# Altium PCB CH32H417QEU6-R0.PcbDoc (part 1 of 2)
Units mil, origin at the board's own origin, x right, y up, seen from the top; angles counter-clockwise.
Board outline 3149.61 x 3818.9 mil, 4 copper layers (Top Layer, Layer 1, Layer 2, Bottom Layer), stack 23.756 mil thick; 96 components, 143 nets, 504 pads, 599 vias.
Unrouted connection lines stored in the file: 18.
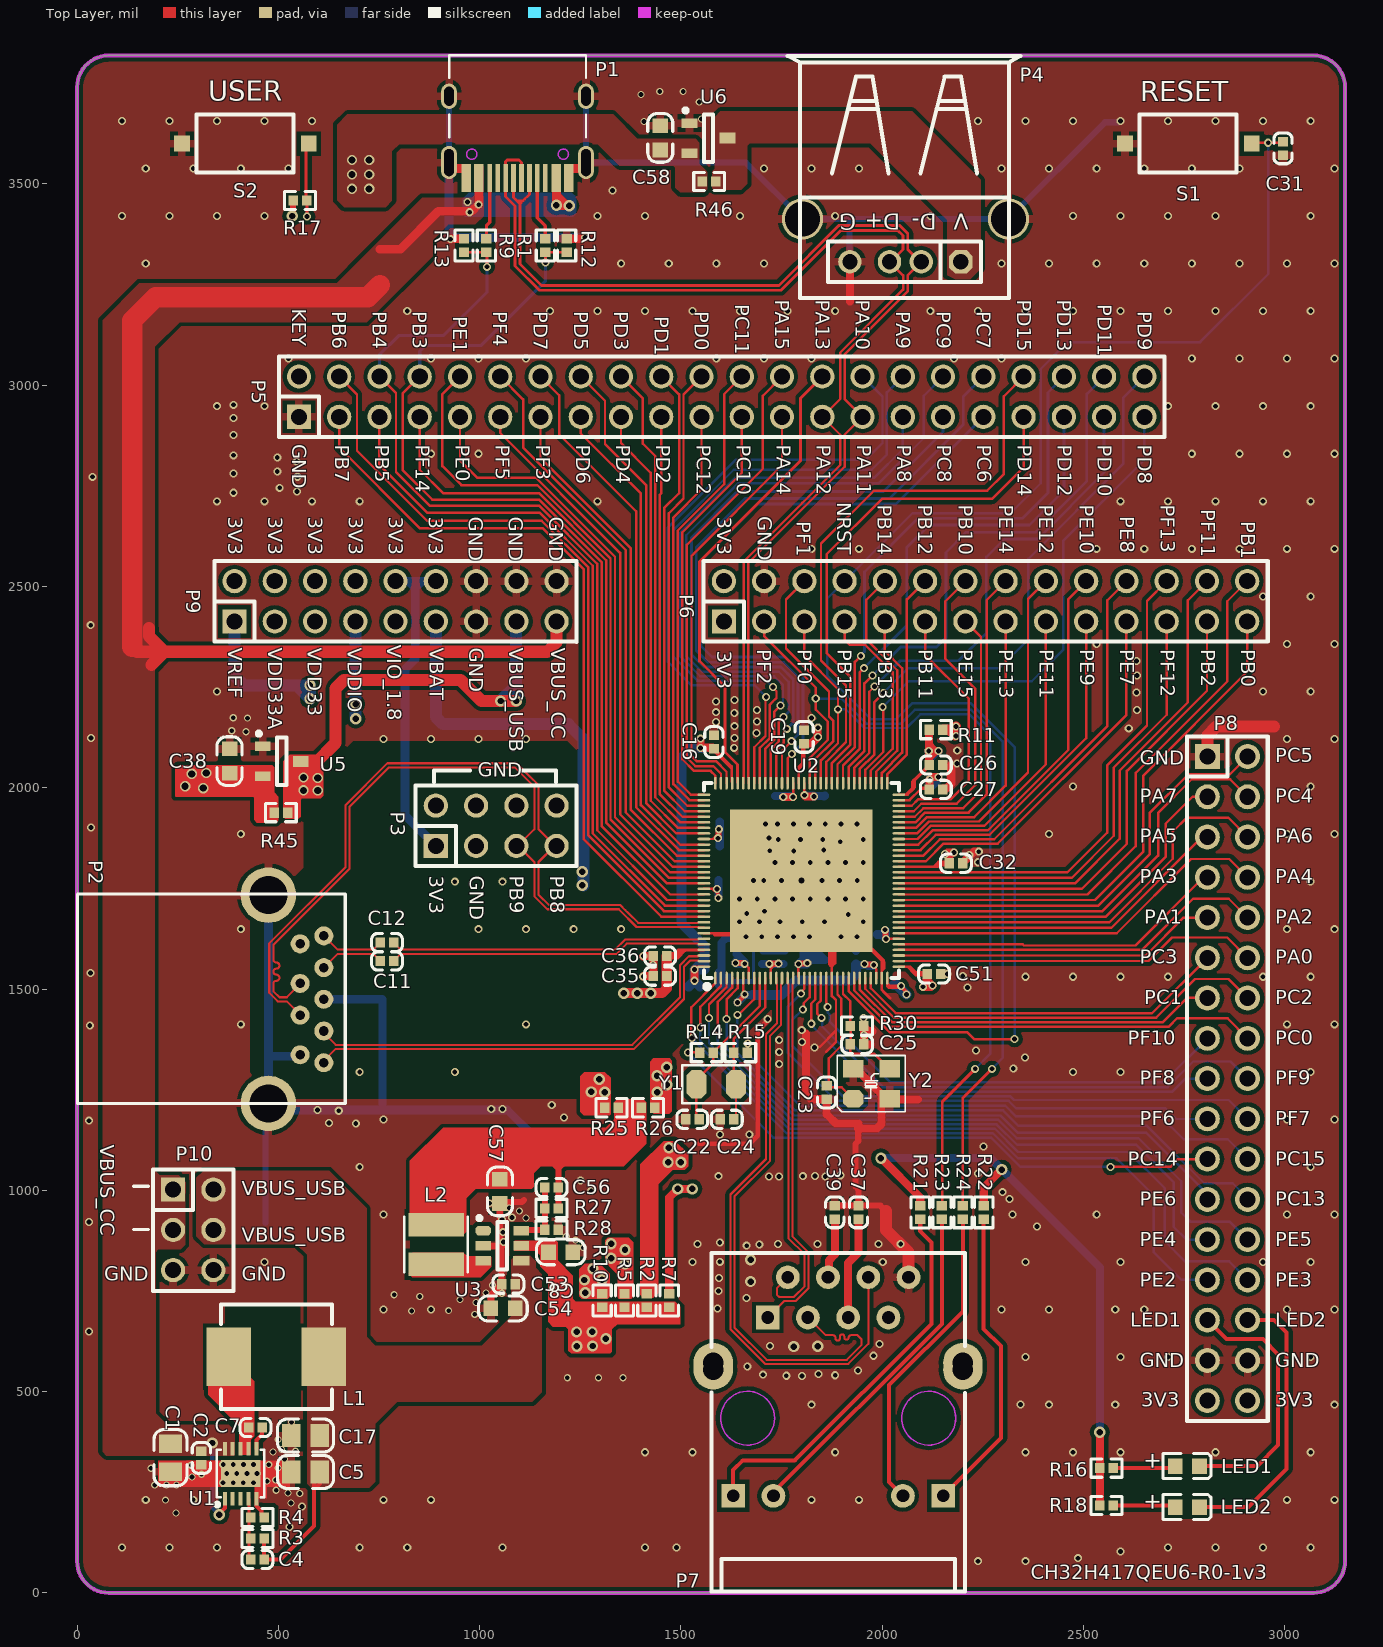
[diagram p0: Top Layer view]
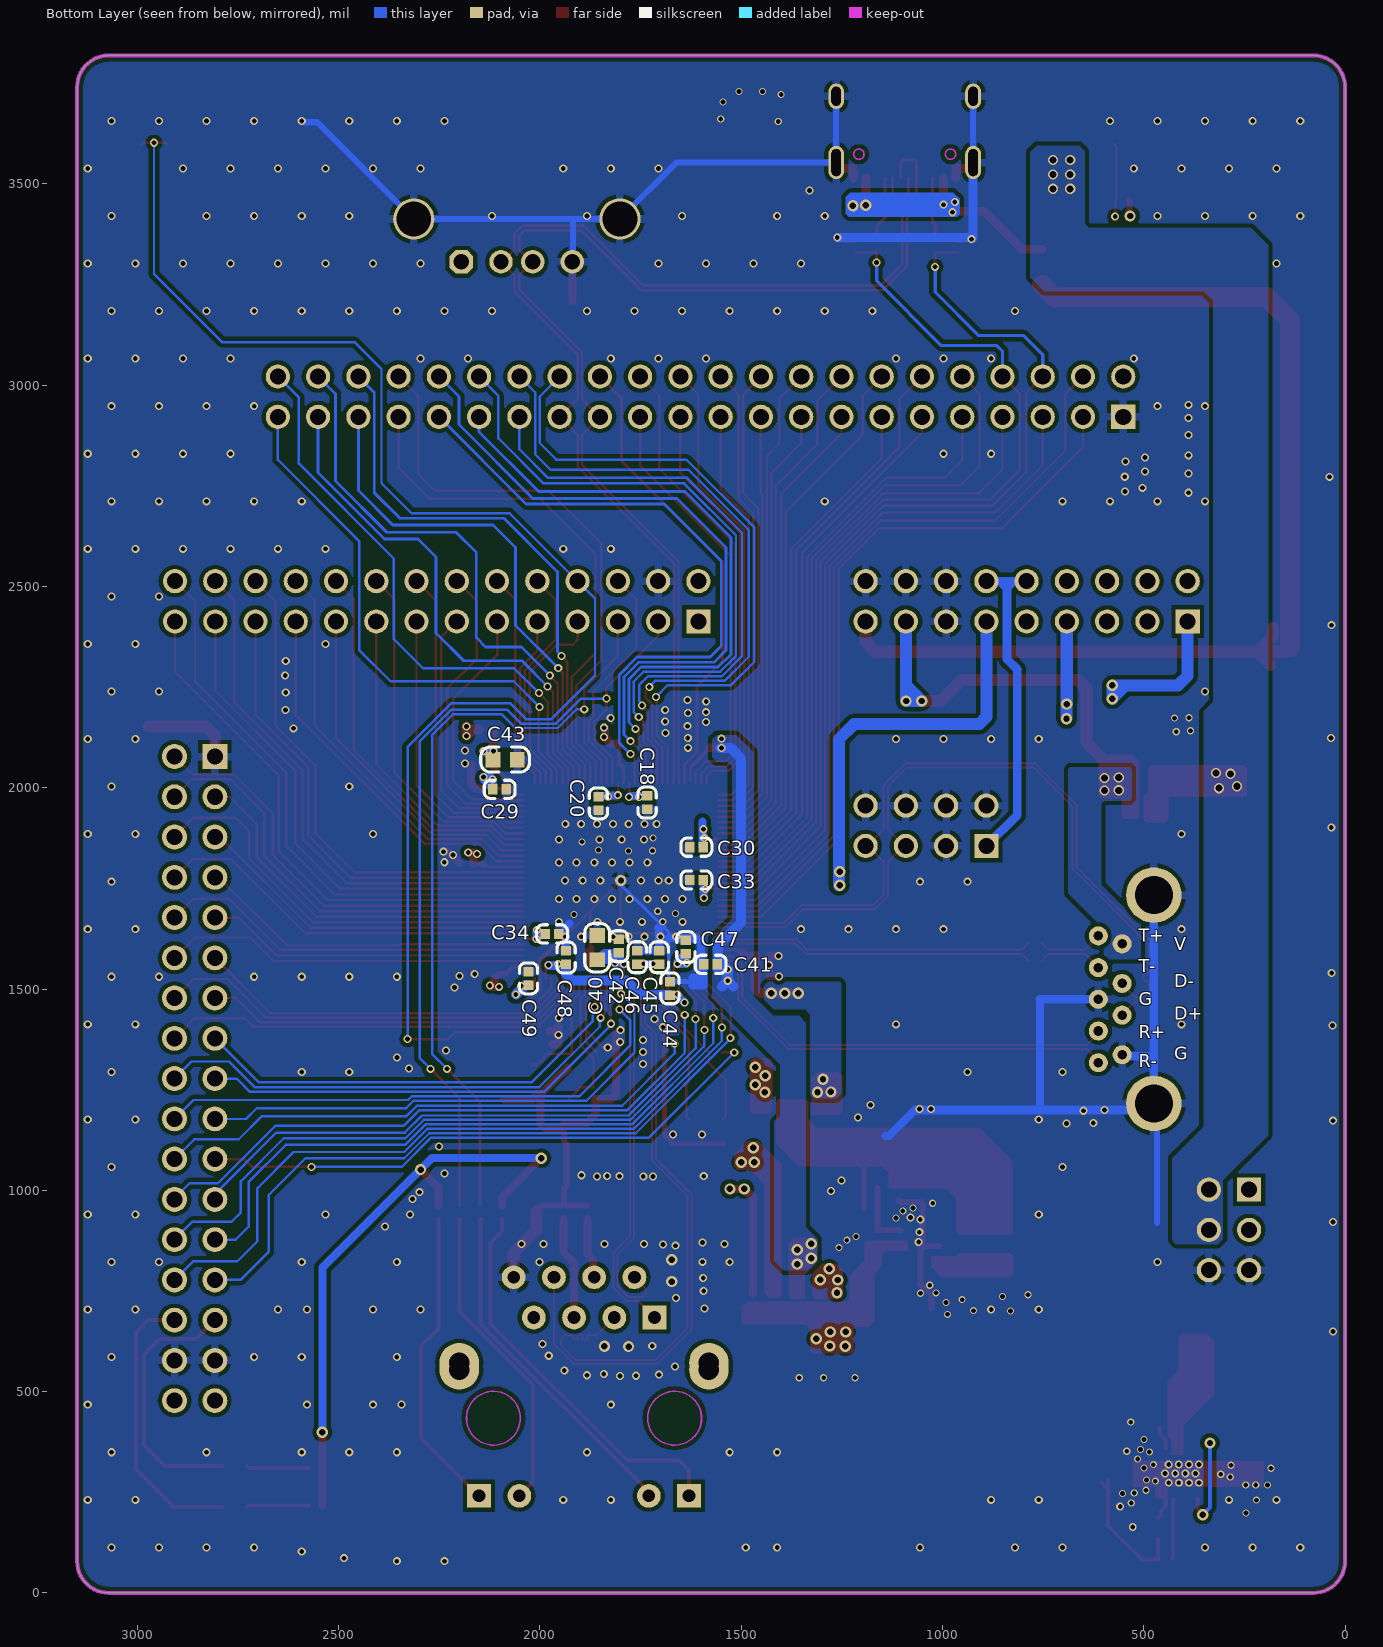
[diagram p1: Bottom Layer view, seen from below]
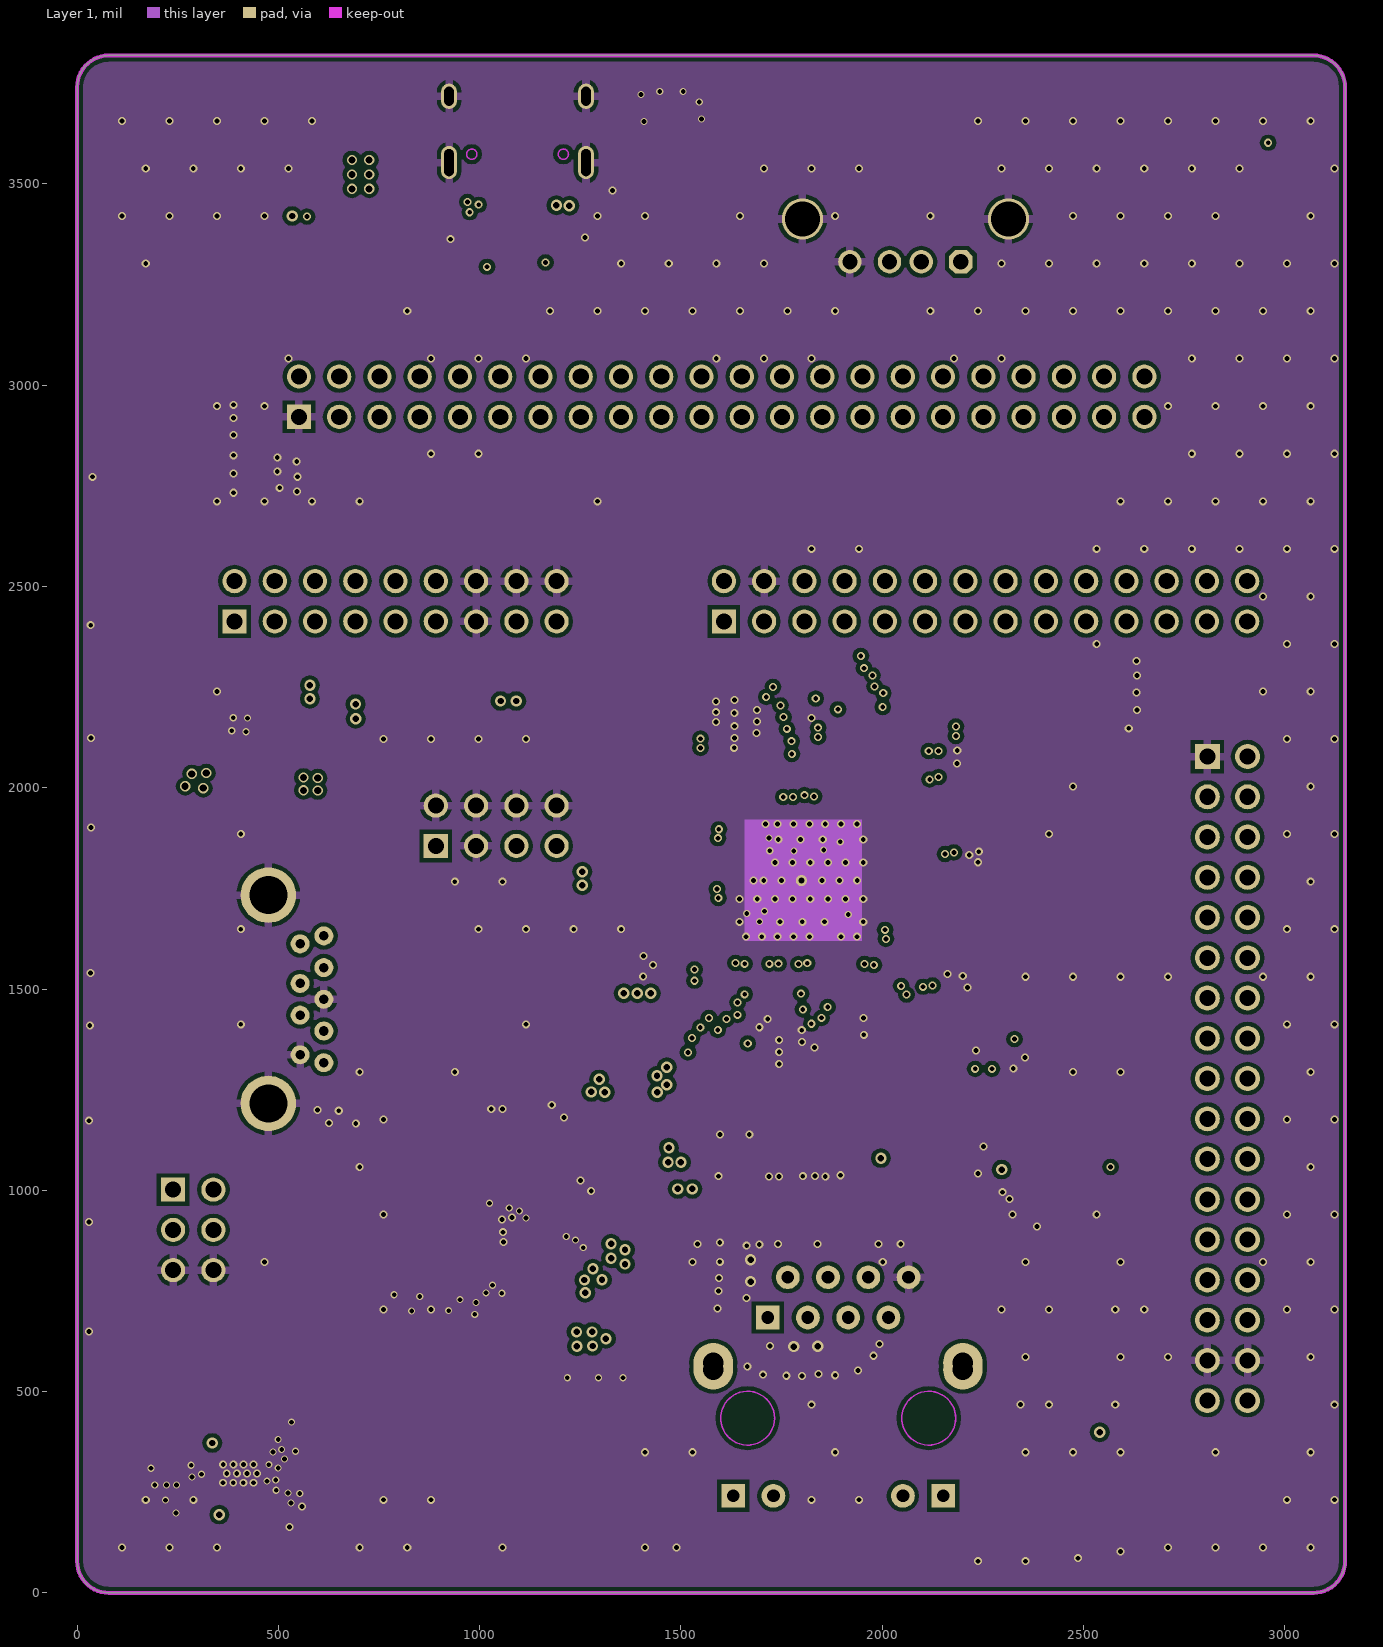
[diagram p2: Layer 1]
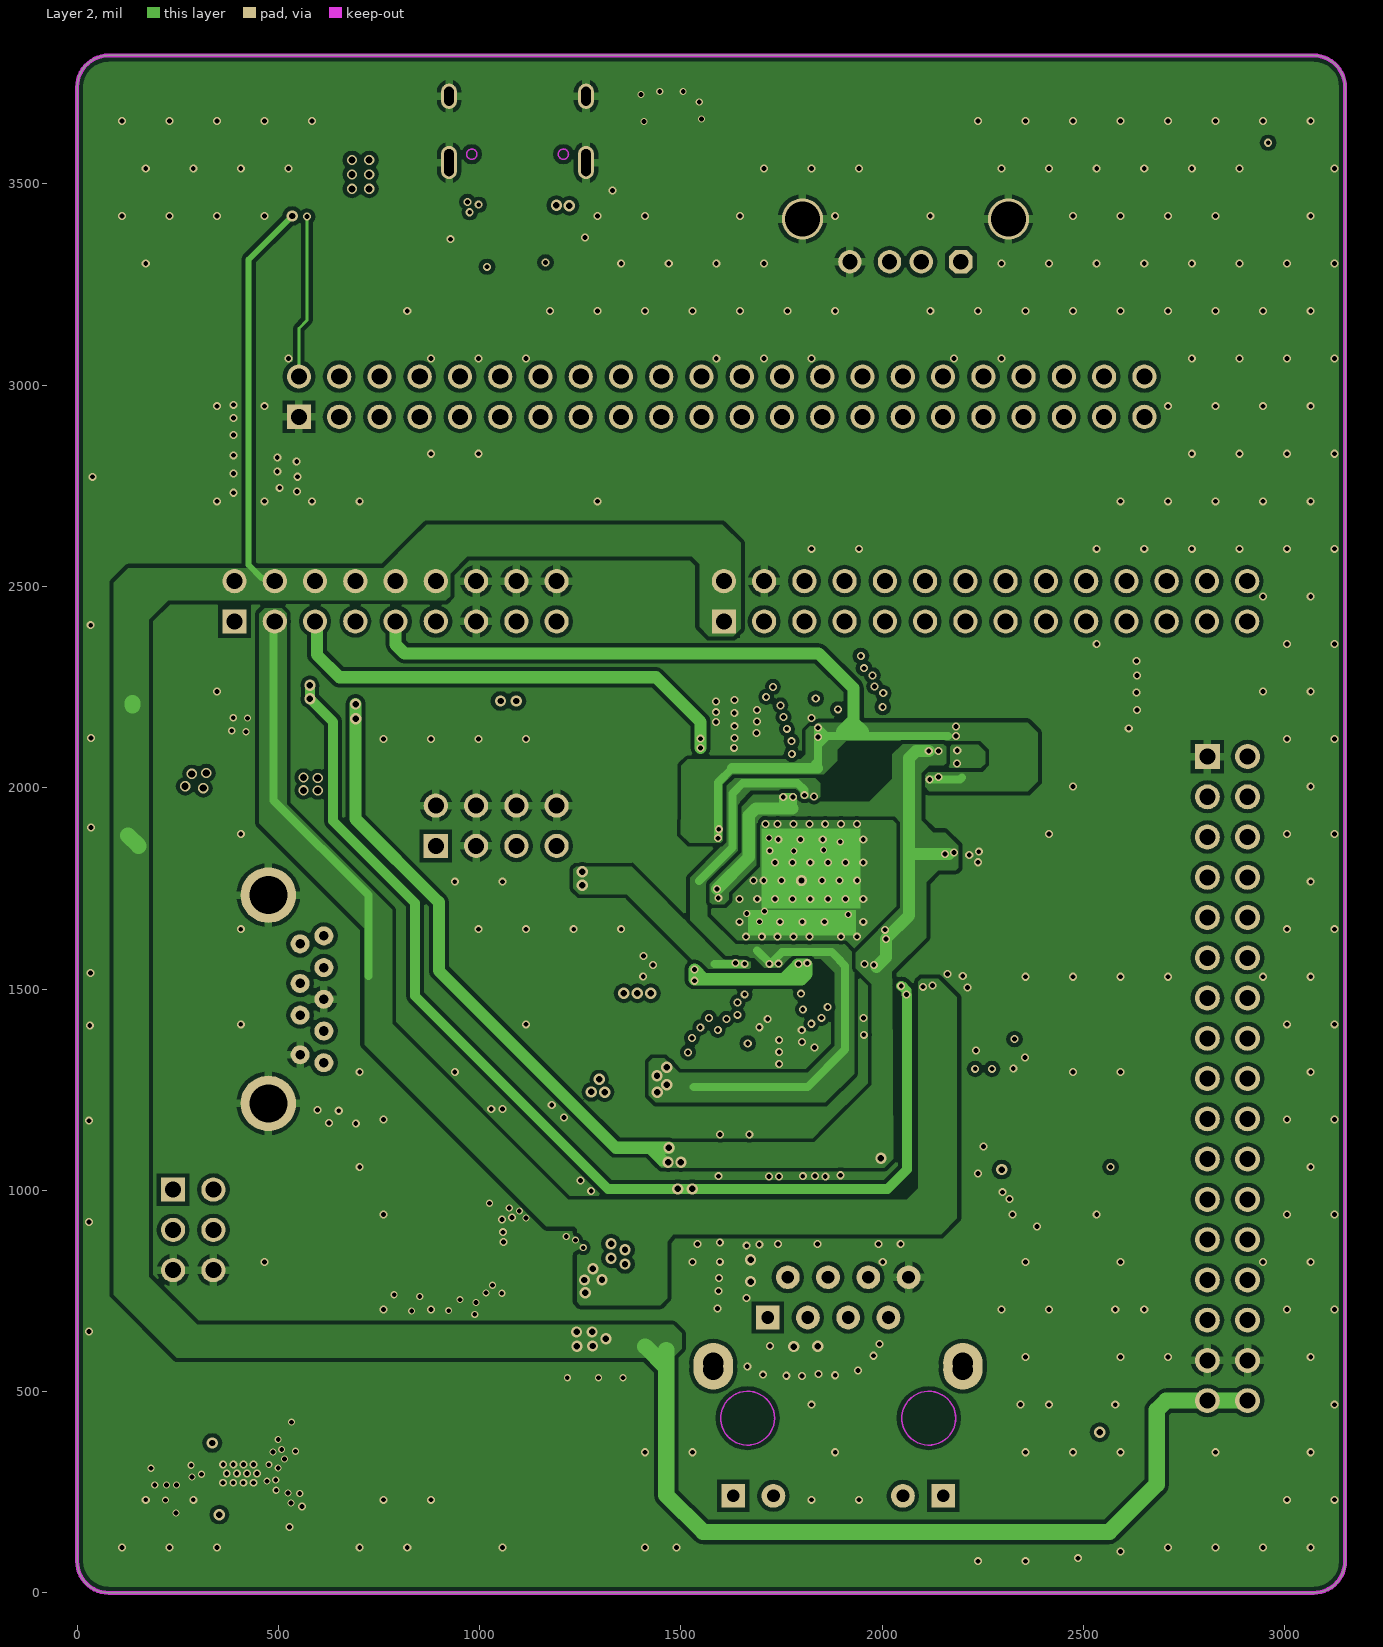
[diagram p3: Layer 2]

## Layer stack, top to bottom
Top Solder: solder mask 0.4, Solder Resist, Dk 3.5
Top Layer: signal copper 1.4
Dielectric 2: prepreg 2.8, PP-006, Dk 4.1
Layer 1: signal copper 1.378
Dielectric 1: dielectric 12.6, FR-4, Dk 4.8
Layer 2: signal copper 1.378
Dielectric 3: prepreg 2.8, PP-006, Dk 4.1
Bottom Layer: signal copper 1.4
Bottom Solder: solder mask 0.4, Solder Resist, Dk 3.5

## Board outline
0,78.74 0,3740.16 cw(c78.74,3740.16) 78.74,3818.9 3070.87,3818.9 cw(c3070.87,3740.16) 3149.61,3740.16 3149.61,78.74 cw(c3070.87,78.74) 3070.87,0 78.74,0 cw(c78.74,78.74)

## Design rules (kind name [scope] priority, off if disabled: settings)
Clearance Clearance_1 [InPolygon] p1: gap=10 ignorepadtopadclearanceinfootprint=FALSE except(0: Arc-Hole Track-Hole SMDPad-Hole THPad-Hole Via-Hole Fill-Hole Poly-Hole Region-Hole Text-Hole)
Clearance [All] p2: gap=6 ignorepadtopadclearanceinfootprint=FALSE except(0: Arc-Hole Track-Hole SMDPad-Hole THPad-Hole Via-Hole Fill-Hole Poly-Hole Region-Hole Text-Hole; 5: Arc-Arc Arc-Track Track-Track; 7: Arc-Via Track-Via SMDPad-Via THPad-Via Via-Via Via-Fill Via-Poly Via-Region Via-Text)
ComponentClearance [All] p1 off: gap=10 collisioncheckmode=3 verticalgap=10 showdistances=FALSE
DiffPairsRouting [All] p1: maxlimit=10 minlimit=5 mostfreqgap=8 toplayer_minwidth=5 toplayer_maxwidth=15 toplayer_prefwidth=8 midlayer1_minwidth=5 midlayer1_maxwidth=15 midlayer1_prefwidth=8 midlayer2_minwidth=5 midlayer2_maxwidth=15 midlayer2_prefwidth=8 bottomlayer_minwidth=5 bottomlayer_maxwidth=15 bottomlayer_prefwidth=8 maxuncoupledlength=500
MinimumSolderMaskSliver [All] p1 off: minsoldermaskwidth=10
PolygonConnect PolygonConnect_2 [InPolygonClass('New Class')] p1: connectstyle=Direct reliefconductorwidth=10 reliefentries=4 polygonreliefangle="90 Angle" airgapwidth=10
PolygonConnect PolygonConnect_1 [IsVia] p2: connectstyle=Direct reliefconductorwidth=10 reliefentries=4 polygonreliefangle="90 Angle" airgapwidth=10
PolygonConnect [All] p3: connectstyle=Relief reliefconductorwidth=20 reliefentries=4 polygonreliefangle="90 Angle" airgapwidth=10
RoutingVias [All] p1: holewidth=16 width=28 viastyle="Through Hole" minholewidth=12 minwidth=20 maxholewidth=28 maxwidth=50
SilkToSilkClearance [All] p1 off: silktosilkclearance=10
SilkToSolderMaskClearance [IsPad] p1 off: minsilkscreentomaskgap=10 clearancetoexposedcopper=TRUE
SolderMaskExpansion [All] p1: expansion=2 istentingtop=FALSE
Width [All] p1: maxlimit=100 minlimit=5 preferedwidth=10
25 further rules are at their usual default settings.

## Classes and differential pairs
polygon class "New Class": 3V3 5V VBAT VBUS_CC VBUS_USB VDD33 VDD33A VDD_1.2A VDDIO VDDK VIO_1.8
differential pair MDIT: +MDITN -MDITP
differential pair MDIR: +MDIRN -MDIRP
differential pair USBSS_TX: +USBSS_TXN -USBSS_TXP
differential pair USBSS_RX: +USBSS_RXN -USBSS_RXP
differential pair "PB9 PB8": +PB9 -PB8
differential pair NetC12_NetC11: +NetC12_1 -NetC11_1

## Components (designator, comment, footprint, x,y, rotation, side; value= is the part's Value field where it differs from the comment)
C1 "NC(22uF/35V)" 0805_C 231.89,300.77 r90 top
C2 "NC(0.1uF)" 0402_C 308.62,318.52 r180 top
C4 "NC(68pF)" 0402_C 464.63,82.87 r270 top
C5 "NC(22uF)" 0805_C 532.24,300.39 r0 top
C7 "NC(100nF)" 0402_C 459.82,410.69 r270 top
C8 "10uF" 0603_C 1231.44,846.25 r180 top
C11 "0.1uF" 0402_C 753,1569.55 r90 top
C12 "0.1uF" 0402_C 753,1615.55 r90 top
C16 "0.1uF" 0402_C 1581.82,2096.55 r180 top
C17 "NC(22uF)" 0805_C 532.24,390.77 r0 top
C18 "0.1uF" 0402_C 1733.73,1979.78 r180 bottom
C19 "0.1uF" 0402_C 1805.72,2109.68 r180 top
C20 "0.1uF" 0402_C 1854.67,1977.78 r180 bottom
C22 "12pF" 0402_C 1544.83,1176.41 r270 top
C23 "18pF" 0402_C 1861.92,1226.2 r180 top
C24 "12pF" 0402_C 1630.49,1176.41 r270 top
C25 "18pF" 0402_C 1954.11,1362.7 r270 top
C26 "0.1uF" 0402_C 2116.2,2056.47 r90 top
C27 "0.1uF" 0402_C 2116.2,1995.74 r90 top
C29 "2.2uF" 0402_C 2083.25,1995.96 r270 bottom
C30 "0.1uF" 0402_C 1594.62,1852.38 r270 bottom
C31 "0.1uF" 0402_C 2995.38,3571.42 r180 top
C32 "0.1uF" 0402_C 2166.18,1812.36 r90 top
C33 "0.1uF" 0402_C 1628.09,1770.88 r90 bottom
C34 "0.1uF" 0402_C 1953.31,1636.83 r270 bottom
C35 "2.2uF" 0402_C 1431.18,1532.07 r90 top
C36 "0.1uF" 0402_C 1431.18,1582.07 r90 top
C37 "0.1uF" 0402_C 1941,962 r0 top
C38 "10uF" 0603_C 378.59,2035.92 r90 top
C39 "0.1uF" 0402_C 1882,962 r0 top
C40 "10uF" 0603_C 1857.68,1633.2 r270 bottom
C41 "0.1uF" 0402_C 1592.55,1561.31 r90 bottom
C42 "0.1uF" 0402_C 1804.22,1623.03 r180 bottom
C43 "10uF" 0603_C 2056.09,2069.92 r0 bottom
C44 "0.1uF" 0402_C 1677.11,1518.47 r180 bottom
C45 "0.1uF" 0402_C 1703.67,1595.53 r180 bottom
C46 "2.2uF" 0402_C 1758.31,1562.06 r0 bottom
C47 "0.1uF" 0402_C 1637.5,1620.9 r180 bottom
C48 "0.1uF" 0402_C 1935,1561.33 r0 bottom
C49 "0.1uF" 0402_C 2028.52,1543.1 r180 bottom
C51 "0.1uF" 0402_C 2145.35,1537.35 r270 top
C53 "1uF" 0402_C 1054.6,766.89 r90 top
C54 "10uF" 0603_C 1027.44,706.55 r0 top
C56 "NC(4.7pF)" 0402_C 1195.21,1006.82 r270 top
C57 "NC(10uF)" 0603_C 1050.21,967.02 r90 top
C58 "10uF" 0603_C 1448.62,3583.9 r90 top
L1 "NC(4.7uH/5A)" IND-SMD_L7.0-W6.6 494.84,586.48 r0 top
L2 "NC(2.2uH)" CD32 891.53,865.35 r90 top
LED1 "LED2  blue" 0603+ 2727.54,315.11 r0 top
LED2 "LED1   blue" 0603+ 2727.54,213.2 r0 top
P1 "TYPE-C" TYPE-C-Receptacle-2.0 1093.98,3514.64 r180 top
P2 "USB3.0-A" USB3.0-A-Receptacle 553.86,1612.24 r270 top
P3 "HEADER 4x2" IDC8-2.54mm 891,1855.47 r90 top
P4 "USB_A" USBAF 2195.17,3306.33 r180 top
P5 "" IDC44-2.54MM 551,2921.33 r90 top
P6 "HEADER 14x2" IDC28-2.54MM 1606.49,2413 r90 top
P7 "HR911105A" HR911105A 1715.25,684 r0 top
P8 "HEADER 17x2" IDC34-2.54MM 2807.49,2077.44 r270 top
P9 "HEADER 9x2" IDC18-2.54MM 391,2413 r90 top
P10 "HEADER 3x2" IDC6-2.54mm 238.39,1001.62 r270 top
R1 "0Ω" 0402 1163,3330.07 r90 top
R2 "0Ω" 0402 1415.3,743.09 r270 top
R3 "NC(15K)" 0402 431.16,135.01 r0 top
R4 "NC(4.7K)" 0402 464.63,187.15 r180 top
R5 "0Ω" 0402 1359.69,743.09 r270 top
R7 "0Ω" 0402 1470.9,743.09 r270 top
R9 "0Ω" 0402 1016.61,3330.07 r90 top
R10 "0Ω" 0402 1304.09,743.09 r270 top
R11 "NC(0Ω)" 0402 2149.66,2144.25 r180 top
R12 "NC(5.1K)" 0402 1215.97,3330.07 r90 top
R13 "NC(5.1K)" 0402 960.99,3330.07 r90 top
R14 "NC(0Ω)" 0402 1547.05,1341.9 r0 top
R15 "NC(0Ω)" 0402 1664.2,1341.9 r180 top
R16 "1k" 0402 2540.39,310.01 r0 top
R17 "10K" 0402 537.19,3458.54 r0 top
R18 "1k" 0402 2540.39,217.03 r0 top
R21 "1k" 0402 2094.28,961.44 r270 top
R22 "1k" 0402 2252,962 r270 top
R23 "0Ω" 0402 2148,962 r270 top
R24 "0Ω" 0402 2200,962 r270 top
R25 "NC(0Ω)" 0402 1310.86,1205.06 r0 top
R26 "NC(0Ω)" 0402 1434.83,1205.06 r180 top
R27 "NC(0Ω)" 0402 1195.21,954.97 r180 top
R28 "NC(200K)" 0402 1161.75,901.86 r0 top
R30 "100K(NC)" 0402 1954.11,1408.06 r180 top
R45 "NC(0Ω)" 0402 489.34,1938.17 r0 top
R46 "NC(0Ω)" 0402 1553.17,3505.74 r0 top
S1 "RESET" SMD_6.1x3.65x2.5mm-KEY 2917.91,3599.92 r180 top
S2 "USER" SMD_6.1x3.65x2.5mm-KEY 575.39,3599.92 r180 top
U1 "NC(CH2024Q)" DFN10_3X3 406.14,296.35 r0 top
U2 "CH32H417QEU6" QFN128_12.3X12.3 1799.13,1769.28 r0 top
U3 "CH2003V" SOT-23-6 1008.77,899.6 r270 top
U5 "CH213" SOT-23-3 461.16,2102.9 r270 top
U6 "CH213" SOT-23-3 1521.19,3650.98 r270 top
Y1 "32.768k" FC-135 1538.3,1263.26 r0 top
Y2 "25M" XT3225 1928.06,1226.89 r0 top

## Footprints (in the part's own frame and the unit in brackets; to place one, negate y for a bottom-side part, rotate by r counter-clockwise, add the part's x,y. Pads: shape width x height; smd on the part's side, far side on the other; paste and mask are expansions set on the pad)
0402 [mm]
  rect 0.6x0.65 smd mask+0.051: 1(0,0) 2(0.85,0)
  silkscreen extent -0.55,-0.58 1.4,0.57
0402_C [mm]
  rect 0.65x0.6 smd mask+0.051: 1(0,0) 2(0,-0.85)
  silkscreen extent -0.58,-1.4 0.57,0.55
0603+ [mm]
  rect 0.93x0.98 smd: 1(0,0) 2(1.54,0)
  silkscreen extent -0.76,-0.79 2.27,0.79
0603_C [mm]
  rect 0.93x0.98 smd mask+0.051: 1(0,0) 2(1.54,0)
  silkscreen extent -0.76,-0.79 2.31,0.79
0805_C [mm]
  rect 1.16x1.47 smd mask+0.051: 1(0,0) 2(1.78,0)
  silkscreen extent -0.88,-1.04 2.66,1.03
CD32 [mm]
  rect 1.5x3.5 smd: 1(-1.25,0) 2(1.25,0)
  silkscreen extent -1.75,-2 1.75,2
DFN10_3X3 [mm]
  rect 2.5x1.7 smd mask+0.051: 0(0,0)
  rect 0.25x0.85 smd mask+0.051: 1(-1,-1.575) 2(-0.5,-1.575) 3(0,-1.575) 4(0.5,-1.575) 5(1,-1.575) 6(1,1.575) 7(0.5,1.575) 8(0,1.575) 9(-0.5,1.575) 10(-1,1.575)
  silkscreen extent -1.57,-2.05 1.5,1.5
FC-135 [mil]
  oct 50x70 smd: 1(0,0) 2(98.43,0)
  silkscreen extent -35,-47 133,47
HR911105A [mm]
  rect 1.5x1.5 hole 0.8: 1(0,0) 9(-2.175,-11.252) 12(11.075,-11.252)
  round 1.5 hole 0.8: 2(1.27,2.54) 3(2.54,0) 4(3.81,2.54) 5(5.08,0) 6(6.35,2.54) 7(7.62,0) 8(8.89,2.54) 10(0.365,-11.252) 11(8.535,-11.252)
  round 2.5 hole 1.3: ""(-3.43,-2.852) ""(-3.43,-3.3) ""(12.32,-3.3) ""(12.32,-2.852)
  Keep-Out Layer circle w0.1: c10.165,-6.352 r1.7
  Keep-Out Layer circle w0.1: c-1.265,-6.352 r1.7
  silkscreen extent -3.55,-17.27 12.45,4.06
IDC6-2.54mm [mil]
  rect 60x60 hole 40: 1(0,0)
  round 60 hole 40: 2(0,100) 3(100,0) 4(100,100) 5(200,0) 6(200,100)
  silkscreen extent -50,-50 252,150
IDC8-2.54mm [mil]
  rect 60x60 hole 40: 1(0,0)
  round 60 hole 40: 2(100,0) 3(0,-100) 4(100,-100) 5(0,-200) 6(100,-200) 7(0,-300) 8(100,-300)
  silkscreen extent -50,-350 150,50
IDC18-2.54MM [mil]
  rect 60x60 hole 40: 1(0,0)
  round 60 hole 40: 2(100,0) 3(0,-100) 4(100,-100) 5(0,-200) 6(100,-200) 7(0,-300) 8(100,-300) 9(0,-400) 10(100,-400) 11(0,-500) 12(100,-500) 13(0,-600) 14(100,-600) 15(0,-700) 16(100,-700) 17(0,-800) 18(100,-800)
  silkscreen extent -51,-850 150,50
IDC28-2.54MM [mil]
  rect 60x60 hole 40: 1(0,0)
  round 60 hole 40: 2(100,0) 3(0,-100) 4(100,-100) 5(0,-200) 6(100,-200) 7(0,-300) 8(100,-300) 9(0,-400) 10(100,-400) 11(0,-500) 12(100,-500) 13(0,-600) 14(100,-600) 15(0,-700) 16(100,-700) 17(0,-800) 18(100,-800) 19(0,-900) 20(100,-900) 21(0,-1000) 22(100,-1000) 23(0,-1100) 24(100,-1100) 25(0,-1200) 26(100,-1200) 27(0,-1300) 28(100,-1300)
  silkscreen extent -50,-1351 150,50
IDC34-2.54MM [mil]
  rect 62x62 hole 40: 1(0,0)
  round 62 hole 40: 2(0,100) 3(100,0) 4(100,100) 5(200,0) 6(200,100) 7(300,0) 8(300,100) 9(400,0) 10(400,100) 11(500,0) 12(500,100) 13(600,0) 14(600,100) 15(700,0) 16(700,100) 17(800,0) 18(800,100) 19(900,0) 20(900,100) 21(1000,0) 22(1000,100) 23(1100,0) 24(1100,100) 25(1200,0) 26(1200,100) 27(1300,0) 28(1300,100) 29(1400,0) 30(1400,100) 31(1500,0) 32(1500,100) 33(1600,0) 34(1600,100)
  silkscreen extent -50,-50 1650,150
IDC44-2.54MM [mil]
  rect 60x60 hole 40: 1(0,0)
  round 60 hole 40: 2(100,0) 3(0,-100) 4(100,-100) 5(0,-200) 6(100,-200) 7(0,-300) 8(100,-300) 9(0,-400) 10(100,-400) 11(0,-500) 12(100,-500) 13(0,-600) 14(100,-600) 15(0,-700) 16(100,-700) 17(0,-800) 18(100,-800) 19(0,-900) 20(100,-900) 21(0,-1000) 22(100,-1000) 23(0,-1100) 24(100,-1100) 25(0,-1200) 26(100,-1200) 27(0,-1300) 28(100,-1300) 29(0,-1400) 30(100,-1400) 31(0,-1500) 32(100,-1500) 33(0,-1600) 34(100,-1600) 35(0,-1700) 36(100,-1700) 37(0,-1800) 38(100,-1800) 39(0,-1900) 40(100,-1900) 41(0,-2000) 42(100,-2000) 43(0,-2100) 44(100,-2100)
  silkscreen extent -50,-2150 150,50
IND-SMD_L7.0-W6.6 [mm]
  rect 2.8x3.7 smd: 1(-3,0) 2(3,0)
  silkscreen extent -3.5,-3.3 3.5,3.3
QFN128_12.3X12.3 [mm]
  rect 9x9 smd mask+0.051: 0(0,0)
  round 0.711 hole 0.381 mask+0.051: 0(0,0)
  oval 0.16x0.8 smd mask+0.051: 1(-5.425,-6.15) 2(-5.075,-6.15) 3(-4.725,-6.15) 4(-4.375,-6.15) 5(-4.025,-6.15) 6(-3.675,-6.15) 7(-3.325,-6.15) 8(-2.975,-6.15) 9(-2.625,-6.15) 10(-2.275,-6.15) 11(-1.925,-6.15) 12(-1.575,-6.15) 13(-1.225,-6.15) 14(-0.875,-6.15) 15(-0.525,-6.15) 16(-0.175,-6.15) 17(0.175,-6.15) 18(0.525,-6.15) 19(0.875,-6.15) 20(1.225,-6.15) 21(1.575,-6.15) 22(1.925,-6.15) 23(2.275,-6.15) 24(2.625,-6.15) 25(2.975,-6.15) 26(3.325,-6.15) 27(3.675,-6.15) 28(4.025,-6.15) 29(4.375,-6.15) 30(4.725,-6.15) 31(5.075,-6.15) 32(5.425,-6.15) 65(5.425,6.15) 66(5.075,6.15) 67(4.725,6.15) 68(4.375,6.15) 69(4.025,6.15) 70(3.675,6.15) 71(3.325,6.15) 72(2.975,6.15) 73(2.625,6.15) 74(2.275,6.15) 75(1.925,6.15) 76(1.575,6.15) 77(1.225,6.15) 78(0.875,6.15) 79(0.525,6.15) 80(0.175,6.15) 81(-0.175,6.15) 82(-0.525,6.15) 83(-0.875,6.15) 84(-1.225,6.15) 85(-1.575,6.15) 86(-1.925,6.15) 87(-2.275,6.15) 88(-2.625,6.15) 89(-2.975,6.15) 90(-3.325,6.15) 91(-3.675,6.15) 92(-4.025,6.15) 93(-4.375,6.15) 94(-4.725,6.15) 95(-5.075,6.15) 96(-5.425,6.15)
  oval 0.8x0.16 smd mask+0.051: 33(6.15,-5.425) 34(6.15,-5.075) 35(6.15,-4.725) 36(6.15,-4.375) 37(6.15,-4.025) 38(6.15,-3.675) 39(6.15,-3.325) 40(6.15,-2.975) 41(6.15,-2.625) 42(6.15,-2.275) 43(6.15,-1.925) 44(6.15,-1.575) 45(6.15,-1.225) 46(6.15,-0.875) 47(6.15,-0.525) 48(6.15,-0.175) 49(6.15,0.175) 50(6.15,0.525) 51(6.15,0.875) 52(6.15,1.225) 53(6.15,1.575) 54(6.15,1.925) 55(6.15,2.275) 56(6.15,2.625) 57(6.15,2.975) 58(6.15,3.325) 59(6.15,3.675) 60(6.15,4.025) 61(6.15,4.375) 62(6.15,4.725) 63(6.15,5.075) 64(6.15,5.425) 97(-6.15,5.425) 98(-6.15,5.075) 99(-6.15,4.725) 100(-6.15,4.375) 101(-6.15,4.025) 102(-6.15,3.675) 103(-6.15,3.325) 104(-6.15,2.975) 105(-6.15,2.625) 106(-6.15,2.275) 107(-6.15,1.925) 108(-6.15,1.575) 109(-6.15,1.225) 110(-6.15,0.875) 111(-6.15,0.525) 112(-6.15,0.175) 113(-6.15,-0.175) 114(-6.15,-0.525) 115(-6.15,-0.875) 116(-6.15,-1.225) 117(-6.15,-1.575) 118(-6.15,-1.925) 119(-6.15,-2.275) 120(-6.15,-2.625) 121(-6.15,-2.975) 122(-6.15,-3.325) 123(-6.15,-3.675) 124(-6.15,-4.025) 125(-6.15,-4.375) 126(-6.15,-4.725) 127(-6.15,-5.075) 128(-6.15,-5.425)
  silkscreen extent -6.15,-6.84 6.15,6.15
SMD_6.1x3.65x2.5mm-KEY [mm]
  rect 1x1 smd: 1(0,0) 2(8,0)
  silkscreen extent 0.98,-1.83 7.08,1.83
SOT-23-3 [mm] "SOT-23-3"
  rect 0.6x1 smd: 1(0,0) 2(1.9,0)
  rect 0.7x1 smd: 3(0.95,2.4)
  silkscreen extent -0.93,-0.38 2.45,1.49
SOT-23-6 [mm] "SOT-23-6"
  oct 0.6x1 smd: 1(0,0)
  rect 0.6x1 smd: 2(0.95,0) 3(1.9,0) 5(0.95,2.4) 6(0,2.4)
  rect 0.6x1.04 smd: 4(1.9,2.4)
  silkscreen extent -0.93,-0.38 2.45,1.49
TYPE-C-Receptacle-2.0 [mm]
  oval 1x2.1 hole 0.6 slot 1.7 at 90 deg: 0(-4.32,-0.97) 0(4.32,-0.97)
  oval 1x1.6 hole 0.6 slot 1.2 at 90 deg: 0(-4.32,-5.15) 0(4.32,-5.15)
  rect 0.6x1.75 smd mask+0.051: A1(-3.225,0) A4(-2.45,0) B1(3.225,0) B4(2.45,0)
  rect 0.3x1.75 smd mask+0.051: A5(-1.25,0) A6(-0.25,0) A7(0.25,0) A8(1.25,0) B5(1.75,0) B6(0.75,0) B7(-0.75,0) B8(-1.75,0)
  Keep-Out Layer circle w0.1: c2.89,-1.5 r0.325
  Keep-Out Layer circle w0.1: c-2.89,-1.5 r0.325
  silkscreen extent -4.32,-7.75 4.32,-2.55
USB3.0-A-Receptacle [mm]
  round 3.5 hole 2.4: 0(-3.07,-2) 0(10.07,-2)
  round 1.2 hole 0.6: 1(0,0) 2(2.5,0) 3(4.5,0) 4(7,0) 5(7.5,1.5) 6(5.5,1.5) 7(3.5,1.5) 8(1.5,1.5) 9(-0.5,1.5)
  silkscreen extent -3.14,-14.04 10.07,2.85
USBAF [mm]
  round 2.6 hole 2.2: 0(-3,-2.7) 0(10,-2.7)
  oct 1.473x1.473 hole 0.965: 1(0,0)
  round 1.473 hole 0.965: 2(2.5,0) 3(4.5,0) 4(7,0)
  silkscreen extent -3.75,-12.99 10.95,2.29
XT3225 [mm]
  oct 1.3x1.1 smd: 1(0,0)
  rect 1.3x1.1 smd: 2(2.3,0) 3(2.3,1.9) 4(0,1.9)
  silkscreen extent -1.02,-0.8 3.27,2.74

## Part data
C1 C4 C5 C17: library part "0603 100nF (104) 10% 50V", "贴片电容", Package=0603, SuppliersPartNumber=C14663, ComponentLink1Description=供应商链接, ComponentLink1URL=http://www.szlcsc.com/product/details_15331.html, Supplier=LC
C2 C8 C11 C12 C16 C18 C19 C20 C26 C27 C29 C30 C32 C33 C34 C35 C36 C37 C38 C39 C40 C41 C42 C43 C44 C45 C46 C47 C48 C49 C51 C53 C54 C56 C57 C58: library part CAP, "Capacitor"
C7: library part "0603 1uF (105) 10% 50V", "贴片电容", Package=0603, SuppliersPartNumber=C15849, ComponentLink1Description=供应商链接, ComponentLink1URL=http://www.szlcsc.com/product/details_16531.html, Supplier=LC
C22 C23 C24 C25 C31: library part Cap, "Capacitor"
L1 L2: library part INDUCTOR
LED1 LED2: library part LED0, "Typical INFRARED GaAs LED", LatestRevisionDate=08-Jul-2005, LatestRevisionNote="Mech Layer 1 removed.", PackageReference=LED-0, Published=8-Jun-2000, Publisher="Altium Limited"
P1: library part TYPE-C1
P3: "Header, 4-Pin, Dual row"
P4: library part USB, "USB Port"
P5: library part "HEADER 22x2", "Header, 22-Pin, Dual row"
P6: "Header, 14-Pin, Dual row"
P8: "Header, 17-Pin, Dual row"
P9: "Header, 9-Pin, Dual row"
P10: "Header, 3-Pin, Dual row"
R1 R2 R3 R4 R5 R7 R9 R10 R11 R14 R15 R16 R18 R21 R22 R23 R24 R25 R26 R27 R28 R45 R46: library part RES
R12 R13 R17 R30: library part Res2, "Resistor"
S1 S2: library part KEY1
U1: library part CH2024Q, "Step-Down DC-DC Converter, 28V input, FB 1.2V, 3A output"
U2: library part CH32H417QET6, "RISC-V FPU HD-MCU, 384MHz, USB3.0 & PD, 100M Ethernet, DVP, SDMMC, QSPI, OPA, ADC, DAC"
U3: library part CH2003K, "Step-Down DC-DC Converter, 5V input, FB 0.6V, 800mA output, with LDO 3.3V * 200mA"
U5 U6: library part CH213E, "Ideal Diode 5V*1A"
Y1 Y2: library part XTAL, "Crystal Oscillator", LatestRevisionDate=17-Jul-2002, LatestRevisionNote="Re-released for DXP Platform.", PackageReference=R38, Published=8-Jun-2000, Publisher="Altium Limited"

## Via types
v1: diameter 20, hole 12, Top Layer to Bottom Layer, tented both sides, 461 vias
v2: diameter 17.72, hole 11.81, Top Layer to Bottom Layer, tented both sides, 62 vias
v3: diameter 28, hole 16, Top Layer to Bottom Layer, tented both sides, 48 vias
v4: diameter 25.59, hole 17.72, Top Layer to Bottom Layer, tented both sides, 14 vias
v5: diameter 19.68, hole 11.81, Top Layer to Bottom Layer, tented both sides, 14 vias

## Nets (pads, with @x,y where several pads share a name; then routed paths per layer and width w, separated by ;. In a path a pad name is that pad's centre, name@x,y a point inside that pad or via, vN(x,y) a via of type N, cw(c..) or ccw(c..) an arc to the next point about the centre after c; other vN are vias at no path point)
1V2: C56.1 C57.2 L2.2 R25.2 R26.2 R27.1 | length 173.3
  Top Layer w15: 1180,1069.49 1195.21,1054.27 ; 1189.41,1078.31 1195.21,1072.51 1195.21,1054.27 ; R27.1@1195.21,954.97 1195.21,1054.27 ; 1214.16,1071.37 1212.3,1071.37 1195.21,1054.27
3V3: C8.2 P3.1 P6.1 P6.2 P8.33 P8.34 P9.2 P9.4 P9.6 P9.8 P9.10 P9.12 R2.2 R5.2 R7.2 R10.2 R17.1 U3.5 | length 4054.9
  Top Layer w15: v3(534.19,3420.13) 535.69,3421.63 535.69,3457.04 R17.1@537.19,3458.54
  Layer 2 w15: P9.4@462.99,2520.77 458.58,2520.77 426.21,2553.14 426.21,3312.15 v3(534.19,3420.13)
  Layer 2 w40: 126.83,1881.21 152.56,1855.47 ; 137.68,2204.97 137.68,2210.41 ; 1410.69,612.31 1463.5,559.51 ; 1463.5,603.26 1463.5,559.51 ; P8.34@2907.49,477.44 P8.33@2807.49,477.44 2705.16,477.44 2681.73,454.01 2681.73,269.27 2564.14,151.68 1554.81,151.68 1463.5,242.99 1463.5,559.51
  Bottom Layer w22: P9.10@791,2513 823.71,2513 ; 859.11,2513 856.34,2513 ; P3.1@891,1855.47 814.4,1932.07 814.4,2294.19 840.03,2319.81 840.03,2496.69 ; P9.12@891,2513 856.34,2513 ; 823.71,2513 840.03,2496.69 ; 823.71,2513 846.75,2513 ; 840.03,2496.69 840.03,2506.28 846.75,2513 ; 840.03,2496.69 856.34,2513 ; 846.75,2513 856.34,2513
  other v3: 1241.51,612.35 1280.3,613.29 1313.61,631.23 1240.56,648.3 1279.04,648.3
5V: C4.1 C5.2 C17.2 C38.1 C53.2 C54.2 C58.1 L1.2 P10.2 P10.4 R3.2 R45.1 R46.1 U3.4 U5.2 U6.2 | length 344.5
  Top Layer w10: R3.2@464.63,135.01 C4.1@464.63,82.87 504.97,82.87 588.43,166.33 588.43,256.9 ; C5.2@588.43,278.09 588.43,256.9 ; C5.2@604.18,272.64 588.43,256.9
  other v4: 313.22,1998.85 268.4,2003.71 284.78,2034.4 320.72,2036.37 682.94,3487.57 725.41,3487.57 682.94,3523.37 725.41,3523.37 682.94,3559.17 725.41,3559.17
CC1: P5.8 R1.1 R12.1 U2.115 | length 2391.2
  Top Layer w6: P5.8@851,3021.33 808.47,2978.8 808.47,2789.22 882.07,2715.61 1147.71,2715.61 1302.88,2560.43 1302.88,1905.15 1473.2,1734.83 U2.115@1557.01,1734.83
  Top Layer w7: v1(1163.61,3304.56) 1163.61,3329.47 R1.1@1163,3330.07 R12.1@1215.97,3330.07
  Bottom Layer w8: P5.8@851,3021.33 851,3084.3 864.96,3098.26 1002.97,3098.26 1163.61,3258.89 v1(1163.61,3304.56)
CC1_1: P1.A5 R1.2 | length 159.3
  Top Layer w8: P1.A5@1143.19,3514.64 1143.19,3415.41 1163,3395.6 R1.2@1163,3363.54
CC1_2: P1.B5 R9.2 | length 154.6
  Top Layer w8: R9.2@1016.61,3363.54 1016.61,3396.36 1025.08,3404.82 P1.B5@1025.08,3514.64
CC2: P5.6 R9.1 R13.1 U2.116 | length 2388
  Top Layer w6: P5.6@751,3021.33 792.08,2980.25 792.08,2784.19 875.47,2700.8 1146.96,2700.8 1291.88,2555.88 1291.88,1894.37 1465.2,1721.05 U2.116@1557.01,1721.05
  Top Layer w7: R13.1@960.99,3330.07 R9.1@1016.61,3330.07 1018.29,3328.4 v1(1018.29,3293.97)
  Bottom Layer w8: P5.6@751,3021.33 751,3075.48 798.54,3123.01 909.95,3123.01 1018.29,3231.35 v1(1018.29,3293.97)
ELED0: P7.11 R24.2 | length 777.8
  Top Layer w10: P7.11@2051.28,241.01 2016.71,275.57 2016.71,515.94 2200,699.22 R24.2@2200,928.54
ELED1: P7.10 R23.2 | length 860.8
  Top Layer w10: P7.10@1729.62,241.01 1729.62,250.06 2148,668.44 R23.2@2148,928.54
FB: C4.2 R3.1 R4.2 U1.4 | length 153.7
  Top Layer w8: U1.4@425.82,234.35 426.75,233.42 426.75,87.29 C4.2@431.16,82.87
GND: C1.1 C2.1 C5.1 C8.1 C16.2 C17.1 C18.2 C19.2 C20.2 C22.2 C23.1 C24.2 C25.1 C26.2 C27.2 C29.1 C30.2 C31.1 C32.2 C33.1 C34.1 C35.1 C36.1 C37.1 C38.2 C39.1 C40.1 C41.1 C42.1 C43.1 C44.1 C45.1 C46.2 C47.1 C48.2 C49.1 C51.1 C53.1 C54.1 C57.1 C58.2 P1.0 P1.A1 P1.B1 P2.0 P2.4 P2.7 P3.2 P3.3 P3.4 P3.6 P3.8 P4.0 P4.4 P5.1 P6.4 P7.8 P8.1 P8.31 P8.32 P9.13 P9.14 P9.16 P9.18 P10.5 P10.6 R4.1 R12.2 R13.2 R28.2 R30.1 S1.2 S2.2 U1.0 U1.5 U2.0 U2.22 U2.31 U2.122 U3.2 U5.1 U6.1 Y2.2 Y2.4 | length 9843.5
  Top Layer w6: U2.122@1557.01,1638.37 1579.69,1638.37 ; U2.0@1625.08,1633.3 1584.77,1633.3 1579.69,1638.37 ; v1(1831.55,1354.48) 1833.35,1356.28 1844.62,1356.28 1885.08,1396.75 ; 1860.22,1343.92 1885.08,1368.78 1885.08,1396.75 ; U2.0@1867.32,1602.81 1867.63,1602.5 1867.63,1561.87 1871.23,1558.27 ; 1873.18,1580.93 1871.5,1579.25 ; U2.0@1879.75,1600.2 1878.75,1599.2 1878.75,1578.36 1874.92,1574.53 ; 1881.38,1586.01 1879.63,1584.25 1879.63,1560.81 ; U2.0@1884.12,1598.12 1883.5,1597.5 1883.5,1564.68 1879.63,1560.81 ; U2.0@1965.34,1610.04 2003.68,1571.7 2003.68,1567.54 2004.42,1566.8 2004.42,1551.37 1998.94,1545.9 ; U2.0@1972.82,1601.83 U2.0@1972.82,1595.6 ; 2020.28,1476.5 1998.94,1497.84 U2.31@1998.94,1527.15 1998.94,1545.9 ; 1579.69,1638.37 1799.13,1638.37 U2.0@1799.13,1769.28 U2.0@1874.92,1693.49 ; 1871.23,1558.27 1874.92,1554.57 ; 1871.23,1558.27 1871.23,1578.97 1871.5,1579.25 ; 1871.5,1579.25 1871.5,1577.96 1874.92,1574.53 ; 1871.5,1579.25 1871.5,1606.9 U2.0@1874.92,1610.32 ; 1874.92,1554.57 U2.22@1874.92,1527.15 1874.92,1482.43 1885.08,1472.28 1885.08,1396.75 ; 1874.92,1554.57 1874.92,1556.1 ; 1874.92,1556.1 1874.92,1574.53 ; 1874.92,1556.1 1879.63,1560.81 ; 1874.92,1574.53 U2.0@1874.92,1610.32 ; U2.0@1874.92,1610.32 U2.0@1874.92,1693.49 ; U2.0@1874.92,1693.49 1905.43,1662.98 U2.0@1972.82,1595.6 ; U2.0@1972.82,1595.6 1998.94,1569.47 1998.94,1545.9
  Top Layer w10: U1.5@445.51,234.35 445.51,215.89 457.82,203.59 457.82,193.96 R4.1@464.63,187.15
  Top Layer w12: 1544.83,1115.78 1670.84,1115.78 1690.54,1135.48 1690.54,1398.04 v1@1716.32,1423.82
  Top Layer w15: U3.2@1008.77,862.2 1042.48,862.2 ; C54.1@1027.44,706.55 1027.44,739.73 1049.31,761.6 1050.29,761.6 1054.6,765.91 C53.1@1054.6,766.89 1054.6,850.08 1042.48,862.2 ; 1109.59,975.36 1105.42,971.19 1054.38,971.19 C57.1@1050.21,967.02 1050.21,869.12 1057.12,862.2 1042.48,862.2 ; C39.1@1882,962 C37.1@1941,962 ; 1940.35,1166.07 1940.35,1153.22 1940.35,1122.49 1933.4,1115.55 1933.4,1009.44 1940.57,1002.27 1940.57,962.43 C37.1@1941,962 ; 2008.96,947.95 1994.92,962 C37.1@1941,962
  Top Layer w20: v1(1406.16,1531.1) 1407.13,1532.07 C35.1@1431.18,1532.07 C36.1@1431.18,1582.07 1407.13,1582.07 v1@1406.16,1581.1 ; 1810.95,1389.07 1810.95,1237.92 1822.67,1226.2 C23.1@1861.92,1226.2 1861.92,1188.92 1884.77,1166.07 1940.35,1166.07 ; 1919.56,3237.25 1919.56,3207.96 P4.4@1919.57,3306.33 ; Y2.4@1932,1304.7 1932,1301.7 1943.65,1290.04 1946.65,1290.04 1998.15,1238.55 2006.96,1238.55 Y2.2@2018.62,1226.89 ; 1940.35,1153.22 1986.33,1153.22 1998.04,1164.94 Y2.2@1998.04,1238.65 ; C25.1@1954.11,1362.7 1970.15,1362.7 ; R30.1@1954.11,1408.06 R30.1@1954.11,1407.08 ; C25.1@1955.92,1365.49 1954.11,1365.49 R30.1@1954.11,1407.08 ; 1976.06,1395.04 1966.15,1395.04 R30.1@1954.11,1407.08 ; Y2.2@2018.61,1225.96 2088.16,1225.96 ; C27.2@2149.66,1995.74 2149.66,1996.72 2151.48,1998.53 2159.6,1998.53 2171.32,2010.25 2171.32,2056.47 ; C32.2@2199.64,1812.36 2199.64,1813.34 2227.43,1841.12 v1(2239.73,1841.12)
  Top Layer w22: P2.0@458.27,1749.95 P2.0@475.12,1733.1 ; P1.0@923.9,3552.83 923.9,3546.11 931.92,3538.09 966.2,3538.09 967.01,3537.28 P1.B1@967.01,3514.64 ; v1(927.78,3362.55) 928.77,3363.54 R13.2@960.99,3363.54 ; R12.2@1215.97,3363.54 1258.43,3363.54 v1(1261.36,3366.47) ; P1.A1@1220.94,3514.64 1220.94,3537.28 1221.76,3538.09 1256.03,3538.09 1264.06,3546.11 P1.0@1264.06,3552.83
  Top Layer w30: 2008.96,947.95 2008.96,901.88 2065.25,845.59 P7.8@2065.25,784 ; P8.1@2807.49,2077.44 2807.49,2129.44 2829.91,2151.86 2972.65,2151.86
  Bottom Layer w8: C44.1@1680.22,1520.02 1680.22,1640.47 1689.01,1649.26 1689.01,1653.74 1693.3,1658.03 1697.78,1658.03 U2.0@1811.56,1771.81
  Bottom Layer w12: 1620.54,1508.44 1630.58,1518.47 C44.1@1677.11,1518.47
  Bottom Layer w15: 467.7,918.31 467.7,1208.36 P2.0@475.12,1215.78 ; P1.0@923.9,3552.83 P1.0@923.9,3717.39 ; P1.0@1264.06,3717.39 P1.0@1264.06,3552.83 1661.27,3552.83 P4.0@1801.46,3412.63 1918.16,3412.63 ; P4.4@1919.57,3306.33 1918.16,3307.75 1918.16,3412.63 ; v1@2591.69,3654.08 2590.34,3655.44 2589.38,3655.44 2586.94,3652.99 2553.64,3652.99 P4.0@2313.28,3412.63 1918.16,3412.63
  Bottom Layer w20: 758.04,1199.14 758.04,1474.44 ; 1068.6,1199.14 1133.27,1134.46 1141.39,1134.46 ; 1594.07,1542.24 1594.07,1541.26 ; 1620.54,1508.44 1594.07,1508.44 1594.07,1529.05 ; 1620.54,1528.91 1620.4,1529.05 1606.28,1529.05 1600.17,1535.16 ; 1680.88,1626.83 1680.59,1626.54 1611.89,1626.54 1600.17,1614.83 1600.17,1535.16 ; 1706.43,1651.97 1703.67,1649.2 C45.1@1703.67,1595.53 C46.2@1758.31,1595.53 ; 1926.48,1663.18 1935,1654.66 C48.2@1935,1594.8 ; 1594.07,1529.05 1600.17,1535.16 ; 1594.07,1529.05 1594.07,1541.26 ; 1594.07,1541.26 1600.17,1535.16
  Bottom Layer w22: P2.0@475.12,1733.1 475.12,1332.81 ; P2.4@553.86,1336.65 550.02,1332.81 475.12,1332.81 ; P2.7@612.91,1474.44 758.04,1474.44 ; P1.0@923.9,3552.83 923.9,3366.43 v1(927.78,3362.55) 931.7,3366.47 v1(1261.36,3366.47) ; 1068.6,1199.14 758.04,1199.14 491.76,1199.14 P2.0@475.12,1215.78 475.12,1332.81
  other v1: 2237.36,78.64 2355.47,78.64 2486.36,86.16 2591.69,103.09 111.38,113.09 229.49,113.09 347.6,113.09 701.93,113.09 820.04,113.09 1056.26,113.09 1410.59,113.09 1488.7,113.09 2709.8,113.09 2827.91,113.09 2946.02,113.09 3064.13,113.09 170.43,231.2 288.54,231.2 760.98,231.2 879.09,231.2 1823.97,231.2 1942.08,231.2 3005.08,231.2 3123.19,231.2 1410.59,349.31 1528.7,349.31 1883.03,349.31 2355.47,349.31 2473.58,349.31 2591.69,349.31 2827.91,349.31 3064.13,349.31 1823.97,467.42 2414.52,467.42 2578.73,467.42 3123.19,467.42 2343.6,468.18 1761.63,539.34 1800.87,538.73 1883.04,540.57 1703.93,541.97 1841.34,543.64 1939.45,552.22 1664.74,562.65 2355.47,585.53 2591.69,585.53 2709.8,585.53 3064.13,585.53 1978.08,589.01 1721.05,612.88 1993.41,618.45 29.91,649.17 760.98,703.64 879.09,703.64 2296.41,703.64 2414.52,703.64 2578.73,703.64 2650.74,703.64 3005.08,703.64 3123.19,703.64 1590.83,706.42 1662.36,732.71 1593.28,749.83 1594.5,782.23 465.71,821.75 1528.7,821.75 1596.36,822.39 2001.14,821.75 2355.47,821.75 2591.69,821.75 2946.02,821.75 3064.13,821.75 1663.18,862.38 1694.57,865.42 1541.19,866.94 1741.14,866.94 1839.34,866.94 1990.91,866.94 2045.81,866.94 1596.36,870.48 1059.17,871.82 1057.62,895.88 2384.43,909.77 29.91,921.33 1055.2,927.11 1079.84,932.04 760.98,939.86 2323.12,939.77 2532.63,939.86 3005.08,939.86 3123.19,939.86 2316.22,977.98 2298.87,995.33 1276.96,998.5 1250.78,1024.67 1718.81,1034.38 1743.25,1034.38 1593.1,1035.09 1802.54,1035.09 1832.97,1035.38 1858.47,1034.54 1896.53,1037.42 2237.36,1041.92 701.93,1057.97 3064.13,1057.97 2251.11,1108.94 1597.1,1138.63 1669.69,1138.63 692.32,1165.59 625.45,1167.18 29.91,1172.95 760.98,1176.08 3005.08,1176.08 3123.19,1176.08 1209.67,1181.1 649.92,1197.59 597.29,1199.56 1028.72,1202.07 1056.96,1202.27 1179.01,1211.75 701.93,1294.19 938.15,1294.19 2473.58,1294.19 2591.69,1294.19 3064.13,1294.19 2325.43,1302.27 1743.99,1313.8 2354.63,1330.26 1743.99,1343.5 2233.19,1347.3 1800.68,1368.17 1743.99,1373.2 1954.11,1386.29 1799.91,1397.68 1694.54,1405.04 31.58,1409.28 406.65,1412.3 1115.31,1412.3 3005.08,1412.3 3123.19,1412.3 1715.32,1425.82 1953.11,1428.07 2212.07,1504.05 2355.47,1530.41 2473.58,1530.41 2591.69,1530.41 2709.8,1530.41 2946.02,1530.41 3064.13,1530.41 2199.9,1532.68 2162,1537.35 33.21,1539.55 1430.69,1559.44 1407.16,1582.1 1661.34,1630 1700.71,1630 1740.08,1630 1779.45,1630 1818.82,1630 1897.56,1630 1936.93,1630 406.65,1648.52 997.2,1648.52 1115.31,1648.52 1233.42,1648.52 1351.53,1648.52 3005.08,1648.52 3123.19,1648.52 1645.59,1666.92 1746.16,1666.92 1801.38,1666.92 1856.59,1666.92 1952.68,1666.92 1645.59,1723.9 1689.46,1723.9 1733.33,1723.9 1777.2,1723.9 1821.07,1723.9 1864.94,1723.9 1908.81,1723.9 1952.68,1723.9 938.15,1766.63 1056.26,1766.63 3064.13,1766.63 1680,1769.28 1705.46,1769.28 1749.33,1769.28 1849.97,1769.28 1893.84,1769.28 1937.71,1769.28 1733.33,1814.65 1777.2,1814.65 1821.07,1814.65 1864.94,1814.65 1908.81,1814.65 1952.68,1814.65 2237.51,1814.82 2216.01,1832.59 1741.68,1871.64 1796.89,1871.64 1852.11,1871.64 1952.68,1871.64 406.65,1884.74 2414.52,1884.74 3005.08,1884.74 3123.19,1884.74 34.2,1900.88 1710,1910 1740.08,1910 1779.45,1910 1818.82,1910 1858.19,1910 1897.56,1910 1936.93,1910 2473.58,2002.85 3064.13,2002.85 2185.8,2059.78 2186.16,2092.11 1632.13,2099.17 760.98,2120.96 879.09,2120.96 997.2,2120.96 1115.31,2120.96 3005.08,2120.96 3123.19,2120.96 34.75,2123.43 1632.73,2123.42 1687.95,2135.71 2612.22,2147.62 1633.07,2152.88 1587.32,2163.62 1688.88,2164.32 1824.21,2173.24 1632.38,2185.81 1587.32,2187.54 1688.88,2193.43 2632.32,2193.31 1586.97,2214.58 1633.07,2217.69 2631.41,2236.26 347.6,2239.07 2946.02,2239.07 3064.13,2239.07 2632.78,2278.76 2631.41,2314.85 2532.63,2357.18 3005.08,2357.18 3123.19,2357.18 33.65,2403.69 2946.02,2475.29 3064.13,2475.29 1823.97,2593.4 1942.08,2593.4 2532.63,2593.4 2650.74,2593.4 2768.85,2593.4 2886.96,2593.4 3005.08,2593.4 3123.19,2593.4 347.6,2711.51 465.71,2711.51 583.82,2711.51 701.93,2711.51 1292.48,2711.51 2591.69,2711.51 2709.8,2711.51 2827.91,2711.51 2946.02,2711.51 3064.13,2711.51 388.66,2732.63 546.36,2736.07 503.16,2744.91 38.35,2772.23 547.34,2772.4 388.66,2780.36 497.27,2785.16 545.37,2810.69 497.27,2820.51 388.66,2825.66 879.09,2829.62 997.2,2829.62 2768.85,2829.62 2886.96,2829.62 3005.08,2829.62 3123.19,2829.62 388.66,2876.12 388.66,2917.98 347.6,2947.73 465.71,2947.73 2709.8,2947.73 2827.91,2947.73 2946.02,2947.73 3064.13,2947.73 388.66,2951.22 524.76,3065.84 879.09,3065.84 997.2,3065.84 1115.31,3065.84 1587.75,3065.84 1705.86,3065.84 1823.97,3065.84 2178.3,3065.84 2296.41,3065.84 2768.85,3065.84 2886.96,3065.84 3005.08,3065.84 3123.19,3065.84 820.04,3183.95 1174.37,3183.95 1292.48,3183.95 1410.59,3183.95 1528.7,3183.95 1646.81,3183.95 1764.92,3183.95 1883.03,3183.95 2119.25,3183.95 2237.36,3183.95 2355.47,3183.95 2473.58,3183.95 2591.69,3183.95 2709.8,3183.95 2827.91,3183.95 2946.02,3183.95 3064.13,3183.95 170.43,3302.06 1351.53,3302.06 1469.64,3302.06 1587.75,3302.06 1705.86,3302.06 2296.41,3302.06 2414.52,3302.06 2532.63,3302.06 2650.74,3302.06 2768.85,3302.06 2886.96,3302.06 3005.08,3302.06 3123.19,3302.06 111.38,3420.17 229.49,3420.17 347.6,3420.17 465.71,3420.17 1292.48,3420.17 1410.59,3420.17 1646.81,3420.17 1883.03,3420.17 2119.25,3420.17 2473.58,3420.17 2591.69,3420.17 2709.8,3420.17 2827.91,3420.17 3064.13,3420.17 1330.17,3483.08 170.43,3538.28 288.54,3538.28 406.65,3538.28 524.76,3538.28 1705.86,3538.28 1823.97,3538.28 1942.08,3538.28 2296.41,3538.28 2414.52,3538.28 2532.63,3538.28 2650.74,3538.28 2768.85,3538.28 2886.96,3538.28 3123.19,3538.28 111.38,3656.39 229.49,3656.39 347.6,3656.39 465.71,3656.39 583.82,3656.39 2237.36,3656.39 2355.47,3656.39 2473.58,3656.39 2591.69,3656.39 2709.8,3656.39 2827.91,3656.39 2946.02,3656.39 3064.13,3656.39
  other v2: 245.87,198.61 531.01,223.05 219.79,230.38 553.16,246.91 523.77,248.19 494.38,255 192.95,267.94 221.89,267.94 246.89,267.94 471.38,277.58 493.53,280.13 285.28,288.09 308.84,294.57 183.74,309.57 499.41,310.39 283.22,316.95 476.23,318.47 515.25,332.53 486.29,349.99 542.24,351.83 508.01,356.38 499.41,380.77 532.29,424.11 1217.68,534.49 1295.27,534.49 1355.95,534.49 987.8,691.83 831.04,700.17 922.93,700.97 991.02,721.19 951.15,728.38 851.19,736.44 787.51,740.47 1054.98,744.12 1015.96,745.33 1031.65,764.23 1257.08,857.58 1237.66,876.18 1215.02,885.02 1115.3,931.29 1098.48,948.76 1073.25,956.02 1024.52,967.89 1695.05,1667.37 1915.43,1685.16 1663.27,1687.77 1707.29,1693.2 1720.56,1843.36 1780.26,1842.76 1854.44,1845.17 1895.43,1865.58 1718.75,1875.32 419.48,2138.87 384.06,2141.4 423.53,2172.77 387.67,2173.84 1407.92,3654.57 1550.87,3660.98 1545.29,3703.27 1400.81,3721.88 1447.33,3729.54 1505.34,3729.54
  other v3: 1779.82,611.82 1839.88,612.76 1672.82,773.25 1672.82,827.68
  other v5: 527.36,163.38 558.74,214.61 362.68,273.55 387.82,273.55 412.97,273.55 438.11,273.55 371.64,296.23 396.78,296.23 421.92,296.23 447.07,296.23 362.81,318.91 387.95,318.91 413.09,318.91 438.24,318.91
KEY: P5.2 R17.2 S2.1 | length 610.7
  Top Layer w7: v1(570.99,3418.51) 570.99,3456.12 568.58,3458.54 568.58,3593.11 S2.1@575.39,3599.92
  Layer 2 w7: P5.2@536.88,3007.21 P5.2@551,3021.33 551,3141.09 570.99,3161.08 v1(570.99,3418.51)
LED1: LED1.2 P8.29 | length 653.1
  Top Layer w10: LED1.2@2788.17,315.11 2931.61,315.11 2983.33,366.83 2983.33,592.2 2945.17,630.35 2854.58,630.35 P8.29@2807.49,677.44
LED2: LED2.2 P8.30 | length 703.2
  Top Layer w10: LED2.2@2788.17,213.2 2909.55,213.2 3003.73,307.38 3003.73,647.21 2973.5,677.44 P8.30@2907.49,677.44
MDIRN: P7.6 U2.12 | length 1485.2
  Top Layer w5: U2.12@1737.13,1527.15 1737.13,1514.2 1739.02,1512.31 1739.02,1415.59 1711.22,1387.8 1711.22,1077.73 1623,989.51 1623,654.61 1708.61,569 1915.91,569 1965.25,618.34 P7.6@1965.25,784
MDIRP: P7.3 U2.13 | length 1485.2
  Top Layer w5: U2.13@1750.91,1527.15 1750.91,1514.2 1749.02,1512.31 1749.02,1411.45 1721.22,1383.66 1721.22,1073.59 1633,985.37 1633,658.75 1712.75,579 1911.77,579 1947.92,615.15 1947.92,630.57 1938.49,640 1933.88,640 1922.05,640 ccw(c1922.05,634.5) 1916.55,634.5 cw(c1911.05,634.5) 1905.55,634.5 1905.55,636.66 ccw(c1900.05,636.66) 1894.55,636.66 1894.55,631.81 cw(c1889.05,631.81) 1883.55,631.81 1883.55,634.5 ccw(c1878.05,634.5) 1878.05,640 1864.55,640 1859.25,640 P7.3@1815.25,684
MDITN: P7.2 U2.14 | length 919.6
  Top Layer w5: U2.14@1764.69,1527.15 1764.69,1514.2 1766.58,1512.31 1766.58,881.28 1806.91,840.94 1806.91,761.52 1780.39,735 1743.96,735 1738.23,740.73 1738.23,756.98 P7.2@1765.25,784
MDITP: P7.1 U2.15 | length 919.3
  Top Layer w5: P7.1@1715.25,684 1756.25,725 1784.54,725 1816.91,757.38 1816.91,845.09 1776.58,885.42 1776.58,1512.31 1778.47,1514.2 U2.15@1778.47,1527.15
NetC7_1: C7.1 U1.6 | length 58.3
  Top Layer w10: U1.6@445.51,358.36 445.59,358.44 445.59,379.37 459.82,393.6 C7.1@459.82,410.69
NetC7_2: C7.2 L1.1 U1.7 U1.8
NetC11_1: C11.1 P2.8 | length 162.5
  Top Layer w5.1: P2.8@612.91,1553.18 612.91,1553.41 647,1587.5 715,1587.5 736.03,1587.5 753,1570.54 C11.1@753,1569.55
NetC12_1: C12.1 P2.9 | length 162.5
  Top Layer w5.1: P2.9@612.91,1631.92 612.91,1631.69 647,1597.6 715,1597.6 736.03,1597.6 753,1614.57 C12.1@753,1615.55
NetC37_2: C37.2 P7.5 | length 255.2
  Top Layer w20: P7.5@1915.25,684 1915.25,819.38 1941,845.13 C37.2@1941,928.54
NetC39_2: C39.2 P7.4 | length 151.5
  Top Layer w20: P7.4@1865.25,784 1867.5,786.25 1867.5,825.94 1882,840.43 C39.2@1882,928.54
NetC56_2: C56.2 R27.2 R28.1 U3.6 | length 163.6
  Top Layer w15: U3.6@1103.26,899.6 1105.02,901.36 1159.99,901.36 1161.74,903.12 C56.2@1161.75,1006.82
NetL2_1: L2.1 U3.3
NetLED1_1: LED1.1 R16.2 | length 155.8
  Top Layer w10: R16.2@2573.86,310.01 2722.45,310.01 LED1.1@2727.54,315.11
NetLED2_1: LED2.1 R18.2 | length 155.3
  Top Layer w10: R18.2@2573.86,217.03 2723.72,217.03 LED2.1@2727.54,213.2
NetP7_9: P7.9 R21.2 | length 978.4
  Top Layer w10: P7.9@1629.62,241.01 1629.62,304.72 1653.41,328.5 1782.56,328.5 2122.43,668.37 2122.43,870.59 2094.28,898.73 R21.2@2094.28,927.98
NetP7_12: P7.12 R22.2 | length 764.9
  Top Layer w10: P7.12@2151.28,241.01 2295.04,384.77 2295.04,612.87 2252,655.9 R22.2@2252,928.54
NRST: C31.2 P6.8 S1.1 U2.25 | length 3973.4
  Top Layer w6: U2.25@1916.26,1527.15 1916.26,1495.15 2019.26,1392.16 2211.33,1392.16 2228.04,1375.44 v1(2328.55,1375.44) ; S1.1@2925.21,3597.53 2929.73,3602.05 v1(2958.61,3602.05) 2986.59,3602.05 C31.2@2990.7,3597.93
  Bottom Layer w6: v1(2328.55,1375.44) 2328.55,2101.19 2219.41,2210.33 2074.73,2210.33 2034.68,2170.28 1971.52,2170.28 1863.28,2278.53 1863.28,2469.79 P6.8@1906.49,2513 2075.17,2681.69 2318.89,2681.69 2393.51,2756.31 2393.51,3040.02 2460.48,3106.99 2789.62,3106.99 2958.61,3275.98 v1(2958.61,3602.05)
OTG_FS_DM: P1.A7 P1.B7 P4.2 P5.29 U2.90 | length 2966.4
  Top Layer w6: U2.90@1668.23,2011.4 1668.23,2024.08 1666.84,2025.47 1666.84,2036.15 1666.84,2557.53 1906.5,2797.19 1906.5,2876.83 P5.29@1951,2921.33 1906.5,2965.83 1906.5,3076.21 2062.87,3232.59 2062.87,3272.46 P4.2@2096.74,3306.33
  Top Layer w7: P1.A7@1084.13,3514.64 1084.13,3466.15 1092.06,3458.23 ; 1111.74,3462.07 1107.9,3458.23 ; P1.B7@1123.5,3514.64 1123.5,3473.83 1107.9,3458.23 ; P4.2@2096.74,3306.33 2094.37,3306.33 2063.37,3337.33 2063.37,3376.3 2043.34,3396.33 1892.03,3396.33 1743.44,3247.74 1153.37,3247.74 1099.98,3301.13 1099.98,3450.31 ; 1092.06,3458.23 1107.9,3458.23 ; 1092.06,3458.23 1099.98,3450.31 ; 1099.98,3450.31 1107.9,3458.23
OTG_FS_DP: P1.A6 P1.B6 P4.3 P5.27 U2.91 | length 2996.2
  Top Layer w6: U2.91@1654.45,2011.4 1654.45,2024.08 1655.84,2025.47 1655.84,2040.71 1655.84,2562.08 1801.27,2707.51 1895.5,2801.74 1895.5,2876.83 P5.27@1851,2921.33 1895.5,2965.83 1895.5,3080.77 2051.87,3237.14 2051.87,3272.46 P4.3@2018,3306.33
  Top Layer w7: P1.A6@1103.82,3514.64 1103.82,3552.74 1097.58,3558.97 1068.55,3558.97 1064.45,3554.87 P1.B6@1064.45,3514.64 1064.45,3468.86 1087.98,3445.34 1087.98,3296.16 1148.4,3235.74 1748.41,3235.74 1897,3384.33 2038.37,3384.33 2051.37,3371.33 2051.37,3337.33 2020.37,3306.33 P4.3@2018,3306.33
PA0: P8.12 U2.34 | length 911.3
  Top Layer w6: U2.34@2041.26,1569.47 2661.33,1569.47 2719.72,1627.86 2857.07,1627.86 P8.12@2907.49,1577.44
PA1: P8.9 U2.35 | length 805.2
  Top Layer w6: U2.35@2041.26,1583.25 2654.42,1583.25 2748.61,1677.44 P8.9@2807.49,1677.44
PA2: P8.10 U2.36 | length 938.3
  Top Layer w6: U2.36@2041.26,1597.03 2644.71,1597.03 2771.94,1724.27 2860.67,1724.27 P8.10@2907.49,1677.44
PA3: P8.7 U2.37 | length 837.6
  Top Layer w6: U2.37@2041.26,1610.81 2348.76,1610.81 2351.54,1608.03 2628.68,1608.03 2798.09,1777.44 P8.7@2807.49,1777.44
PA4: P8.8 U2.39 | length 961.6
  Top Layer w6: U2.39@2041.26,1638.37 2582.46,1638.37 2767.09,1823 2861.93,1823 P8.8@2907.49,1777.44
PA5: P8.5 U2.40 | length 859.5
  Top Layer w6: U2.40@2041.26,1652.15 2569.24,1652.15 2794.53,1877.44 P8.5@2807.49,1877.44
PA6: P8.6 U2.41 | length 1033.1
  Top Layer w6: U2.41@2041.26,1665.93 2563.97,1665.93 2721.66,1823.62 2721.66,1890.75 2756.55,1925.64 2859.29,1925.64 P8.6@2907.49,1877.44
PA7: P8.3 U2.42 | length 937.9
  Top Layer w6: U2.42@2041.26,1679.71 2555.57,1679.71 2703.8,1827.94 2703.8,1910.39 2770.85,1977.44 P8.3@2807.49,1977.44
PA8: P5.31 U2.87 | length 1572.8
  Top Layer w6: U2.87@1709.57,2011.4 1709.57,2097.05 1731.88,2119.37 1731.88,2189.35 v1(1746.85,2204.32)
  Bottom Layer w6: v1(1746.85,2204.32) 1746.85,2208.11 1753.48,2214.74 1753.48,2254.91 1731.41,2276.98 1547.94,2276.98 1497.97,2326.95 1497.97,2633.24 1634.41,2769.68 1979.84,2769.68 2051,2840.84 P5.31@2051,2921.33
PA9: P5.32 U2.88 | length 1672.5
  Top Layer w6: U2.88@1695.79,2011.4 1695.79,2098.83 1720.88,2123.92 1720.88,2206.56 1726.85,2212.53 1726.85,2212.6 1737.17,2222.93 1737.17,2239.69 1728.33,2248.54 v1(1728.33,2250.21)
  Bottom Layer w6: v1@1729.71,2248.82 v1(1728.33,2250.21) 1712.55,2265.98 1540.62,2265.98 1481.27,2325.33 1481.27,2640.16 1630.91,2789.8 1973.65,2789.8 2011.58,2827.73 2011.58,2981.91 P5.32@2051,3021.33
PA10: P5.30 U2.89 | length 1646.1
  Top Layer w6: U2.89@1682.01,2011.4 1682.01,2100.6 1709.88,2128.48 1709.88,2223.84 v1(1711.7,2225.66)
  Bottom Layer w6: v1(1711.7,2225.66) 1682.4,2254.98 1525.15,2254.98 1467.32,2312.81 1467.32,2645.94 1636.45,2815.06 1959.3,2815.06 2000.58,2856.34 2000.58,2971.75 P5.30@1951,3021.33
PA13: P5.28 U2.92 | length 1175.4
  Top Layer w7: U2.92@1640.67,2011.4 1640.67,2058.07 1609.64,2089.1 1609.64,2250.85 1546.14,2314.34 1546.14,2561.29 1797.05,2812.19 1797.05,2967.38 P5.28@1851,3021.33
PA14: P5.25 U2.94 | length 1067.3
  Top Layer w6: U2.94@1613.11,2011.4 1613.11,2039.69 1586.85,2065.95 1538.88,2065.95 1526.03,2078.8 1526.03,2576 1751,2800.97 P5.25@1751,2921.33
PA15: P5.26 U2.95 | length 1169
  Top Layer w6: U2.95@1599.33,2011.4 1599.33,2034.55 1580.18,2053.7 1535.58,2053.7 1514.67,2074.61 1514.67,2603.63 1703.45,2792.41 1703.45,2973.79 P5.26@1751,3021.33
PB0: P6.27 U2.45 | length 1335.5
  Top Layer w6: U2.45@2041.26,1721.05 2528.01,1721.05 2648.46,1841.49 2648.46,2030.24 2906.49,2288.27 P6.27@2906.49,2413
PB1: P6.28 U2.46 | length 1411
  Top Layer w6: U2.46@2041.26,1734.83 2509.79,1734.83 2629.76,1854.81 2629.76,2036.79 2856.77,2263.79 2856.77,2463.28 P6.28@2906.49,2513
PB2: P6.25 U2.47 | length 1247.4
  Top Layer w6: U2.47@2041.26,1748.61 2495.35,1748.61 2607.49,1860.75 2607.49,2041.86 2806.49,2240.86 P6.25@2806.49,2413
PB5: P5.5 U2.117 | length 1768.4
  Top Layer w6: P5.5@751,2921.33 751,2801.85 870.12,2682.72 1149.48,2682.72 1280.88,2551.32 1280.88,1886.37 1459.98,1707.27 U2.117@1557.01,1707.27
PB6: P5.4 U2.118 | length 1927.8
  Top Layer w6: P5.4@651,3021.33 695.3,2977.03 695.3,2837.06 869.38,2662.99 1153.66,2662.99 1269.88,2546.77 1269.88,1881.28 1457.67,1693.49 U2.118@1557.01,1693.49
PB7: P5.3 U2.119 | length 1858
  Top Layer w6: P5.3@651,2921.33 651,2844.76 850.88,2644.88 1156.22,2644.88 1258.24,2542.85 1258.24,1872.28 1450.81,1679.71 U2.119@1557.01,1679.71
PB8: P2.3 P3.7 U2.120 | length 1941.4
  Top Layer w5.1: P2.3@553.86,1435.07 553.86,1436.29 520.75,1469.39 498.43,1469.39 477.27,1490.55 477.27,1613.39 666.6,1802.72 666.6,1956.92 770.47,2060.8 1091.65,2060.8 1124.49,2027.96 1131.6,2020.85 1146.05,2006.4 1146.05,1896.49 P3.7@1187.07,1855.47 ; P3.7@1191,1855.47 P3.7@1187.07,1855.47 ; U2.120@1557.01,1665.93 1544.09,1665.93 1542.25,1664.09 1393.74,1664.09 1368.92,1688.91 1361.81,1696.03 1349.65,1708.19 1172.35,1708.19 1146.05,1734.48 1146.05,1736.38 1146.05,1797.28 1146.05,1815.51 1186.01,1855.47 P3.7@1187.07,1855.47
PB9: P2.2 P3.5 U2.121 | length 1942.4
  Top Layer w5.1: P2.2@553.86,1513.81 553.86,1512.59 520.75,1479.49 502.61,1479.49 487.37,1494.73 487.37,1495.21 487.37,1512.86 cw(c494.92,1512.86) 494.92,1520.41 ccw(c494.92,1527.96) 494.92,1535.51 cw(c494.92,1543.06) 494.92,1550.61 ccw(c494.92,1558.16) 494.92,1565.71 cw(c494.92,1573.26) 487.37,1573.26 487.37,1600.53 487.37,1609.21 676.7,1798.54 676.7,1952.74 774.66,2050.7 1087.46,2050.7 1135.95,2002.21 1135.95,1896.49 P3.5@1094.93,1855.47 ; P3.5@1091,1855.47 P3.5@1094.93,1855.47 ; U2.121@1557.01,1652.15 1544.09,1652.15 1542.25,1653.99 1389.56,1653.99 1345.46,1698.09 1168.16,1698.09 1135.95,1730.3 1135.95,1815.51 1095.99,1855.47 P3.5@1094.93,1855.47
PB10: P6.14 U2.61 | length 774.3
  Top Layer w6: U2.61@2041.26,1941.52 2078.24,1941.52 2096.87,1960.14 2184.71,1960.14 2230.64,2006.07 2230.64,2246.16 2156.73,2320.08 2156.73,2463.24 P6.14@2206.49,2513
PB11: P6.11 U2.62 | length 640.4
  Top Layer w6: U2.62@2041.26,1955.3 2073.08,1955.3 2088.92,1971.14 2169.55,1971.14 2214.89,2016.48 2214.89,2221.68 2106.49,2330.08 P6.11@2106.49,2413
PB12: P6.12 U2.65 | length 540.4
  Top Layer w6: U2.65@2012.72,2011.4 2012.72,2033.73 2061.21,2082.22 2061.21,2467.72 P6.12@2106.49,2513
PB13: P6.9 U2.66 | length 440.1
  Top Layer w6: U2.66@1998.94,2011.4 1998.94,2036.92 2049.21,2087.19 2049.21,2296.82 2025.75,2320.28 2006.49,2339.54 P6.9@2006.49,2413
PB14: P6.10 U2.67 | length 573.9
  Top Layer w6: U2.67@1985.16,2011.4 1985.16,2040.11 2037.21,2092.16 2037.21,2291.85 2013.75,2315.31 1960.57,2368.49 1960.57,2467.09 P6.10@2006.49,2513
PB15: P6.7 U2.68 | length 496.2
  Top Layer w6: P6.7@1906.49,2413 1906.49,2367.26 1918.53,2355.22 1957.28,2355.22 2025.71,2286.79 2025.71,2096.92 1971.38,2042.59 U2.68@1971.38,2011.4
PC0: P8.16 U2.26 | length 1074.2
  Top Layer w6: U2.26@1930.04,1527.15 1930.04,1496.93 2020.25,1406.72 2711.94,1406.72 2732.46,1427.24 2857.7,1427.24 P8.16@2907.49,1377.44
PC1: P8.13 U2.27 | length 951.4
  Top Layer w6: U2.27@1943.82,1527.15 1943.82,1498.71 2024.81,1417.72 2696.9,1417.72 2757.82,1478.63 2806.3,1478.63 P8.13@2807.49,1477.44
PC2: P8.14 U2.28 | length 1065.8
  Top Layer w6: U2.28@1957.6,1527.15 1957.6,1500.48 2029.37,1428.72 2680.28,1428.72 2776.45,1524.89 2860.04,1524.89 P8.14@2907.49,1477.44
PC3: P8.11 U2.29 | length 944
  Top Layer w6: U2.29@1971.38,1527.15 1971.38,1502.26 2033.92,1439.72 2669.76,1439.72 P8.11@2807.49,1577.44
PC4: P8.4 U2.43 | length 1081.9
  Top Layer w6: U2.43@2041.26,1693.49 2546.99,1693.49 2685.02,1831.52 2685.02,1937.41 2768.55,2020.94 2863.99,2020.94 P8.4@2907.49,1977.44
PC5: P8.2 U2.44 | length 1079.6
  Top Layer w6: U2.44@2041.26,1707.27 2536.84,1707.27 2663.98,1834.41 2663.98,1936.98 2760.5,2033.49 2863.54,2033.49 P8.2@2907.49,2077.44
PC6: P5.35 U2.83 | length 1628.6
  Top Layer w6: U2.83@1764.69,2011.4 1764.69,2073.16 v1(1775.32,2083.79)
  Bottom Layer w7: v1(1775.32,2083.79) 1793.42,2101.89 1802.93,2111.4 1802.93,2280.41 1758.74,2324.59 1577.04,2324.59 1549.72,2351.91 1549.72,2563.15 1691.19,2704.61 2034.28,2704.61 P5.35@2251,2921.33
PC7: P5.36 U2.84 | length 1746.5
  Top Layer w6: U2.84@1750.91,2011.4 1750.91,2091.72 v1(1774.77,2115.58)
  Bottom Layer w7: v1(1774.77,2115.58) 1790.93,2131.75 1790.93,2275.44 1754.88,2311.48 1567.73,2311.48 1537.72,2341.49 1537.72,2597.03 1659.4,2718.72 2017.93,2718.72 2201.14,2901.93 2201.14,2971.47 P5.36@2251,3021.33
PC8: P5.33 U2.85 | length 1616.2
  Top Layer w6: U2.85@1737.13,2011.4 1737.13,2093.5 1754.77,2111.14 1754.77,2135.75 1762.88,2143.87 v1(1762.88,2146.27)
  Bottom Layer w7: v1(1762.88,2146.27) 1778.93,2162.32 1778.93,2269.28 1748.73,2299.48 1557.26,2299.48 1525.72,2331.03 1525.72,2621.75 1639.6,2735.62 2003.05,2735.62 2151,2883.57 P5.33@2151,2921.33
PC9: P5.34 U2.86 | length 1713.8
  Top Layer w6: U2.86@1723.35,2011.4 1723.35,2095.27 1742.88,2114.81 1742.88,2163.59 v1(1754.59,2175.29)
  Bottom Layer w6: v1(1754.59,2175.29) 1767.43,2188.13 1767.43,2263.35 1742.8,2287.98 1552.5,2287.98 1512.98,2327.5 1512.98,2627.02 1641.82,2755.86 1990.78,2755.86 2103.06,2868.14 2103.06,2973.39 P5.34@2151,3021.33
PC10: P5.23 U2.96 | length 1029.8
  Top Layer w6: U2.96@1585.55,2011.4 1585.55,2029.68 1573.47,2041.76 1531.97,2041.76 1502.96,2070.76 1502.96,2634.12 1651,2782.16 P5.23@1651,2921.33
PC11: P5.24 U2.97 | length 1150.6
  Top Layer w6: U2.97@1557.01,1982.86 1524.13,1982.86 1491.96,2015.03 1491.96,2638.68 1607.18,2753.9 1607.18,2977.51 P5.24@1651,3021.33
PC12: P5.21 U2.98 | length 1033.9
  Top Layer w6: P5.21@1551,2921.33 1551,2741.21 1480.96,2671.17 1480.96,2009.06 1520.94,1969.08 U2.98@1557.01,1969.08
PC13: P8.24 U2.8 | length 1624.6
  Top Layer w6: v1(1640.23,1435.96) 1643.19,1435.96 1682.01,1474.78 U2.8@1682.01,1527.15
  Bottom Layer w6: v1(1640.23,1435.96) 1640.23,1341.41 1783.28,1198.36 2300.22,1198.36 2338.61,1159.97 2657.38,1159.97 2799.85,1017.51 2870.53,1017.51 2907.49,980.54 P8.24@2907.49,977.44
PC14: P8.21 R14.1 | length 1446.2
  Top Layer w6: v1(1517.27,1342.63) 1546.32,1342.63 R14.1@1547.05,1341.9 ; v1(2567.17,1058.08) 2715.55,1058.08 2734.92,1077.44 P8.21@2807.49,1077.44
  Bottom Layer w6: v1(1517.27,1342.63) 1729.1,1130.8 2270.46,1130.8 2343.18,1058.08 v1(2567.17,1058.08)